# Altium PCB USB_Switcher_v0.0.PcbDoc
Units mil, origin at the board's own origin, x right, y up, seen from the top; angles counter-clockwise.
Board outline 1546.42 x 1811.68 mil, 2 copper layers (Top Layer, Bottom Layer); 11 components, 11 nets, 44 pads, 7 vias.
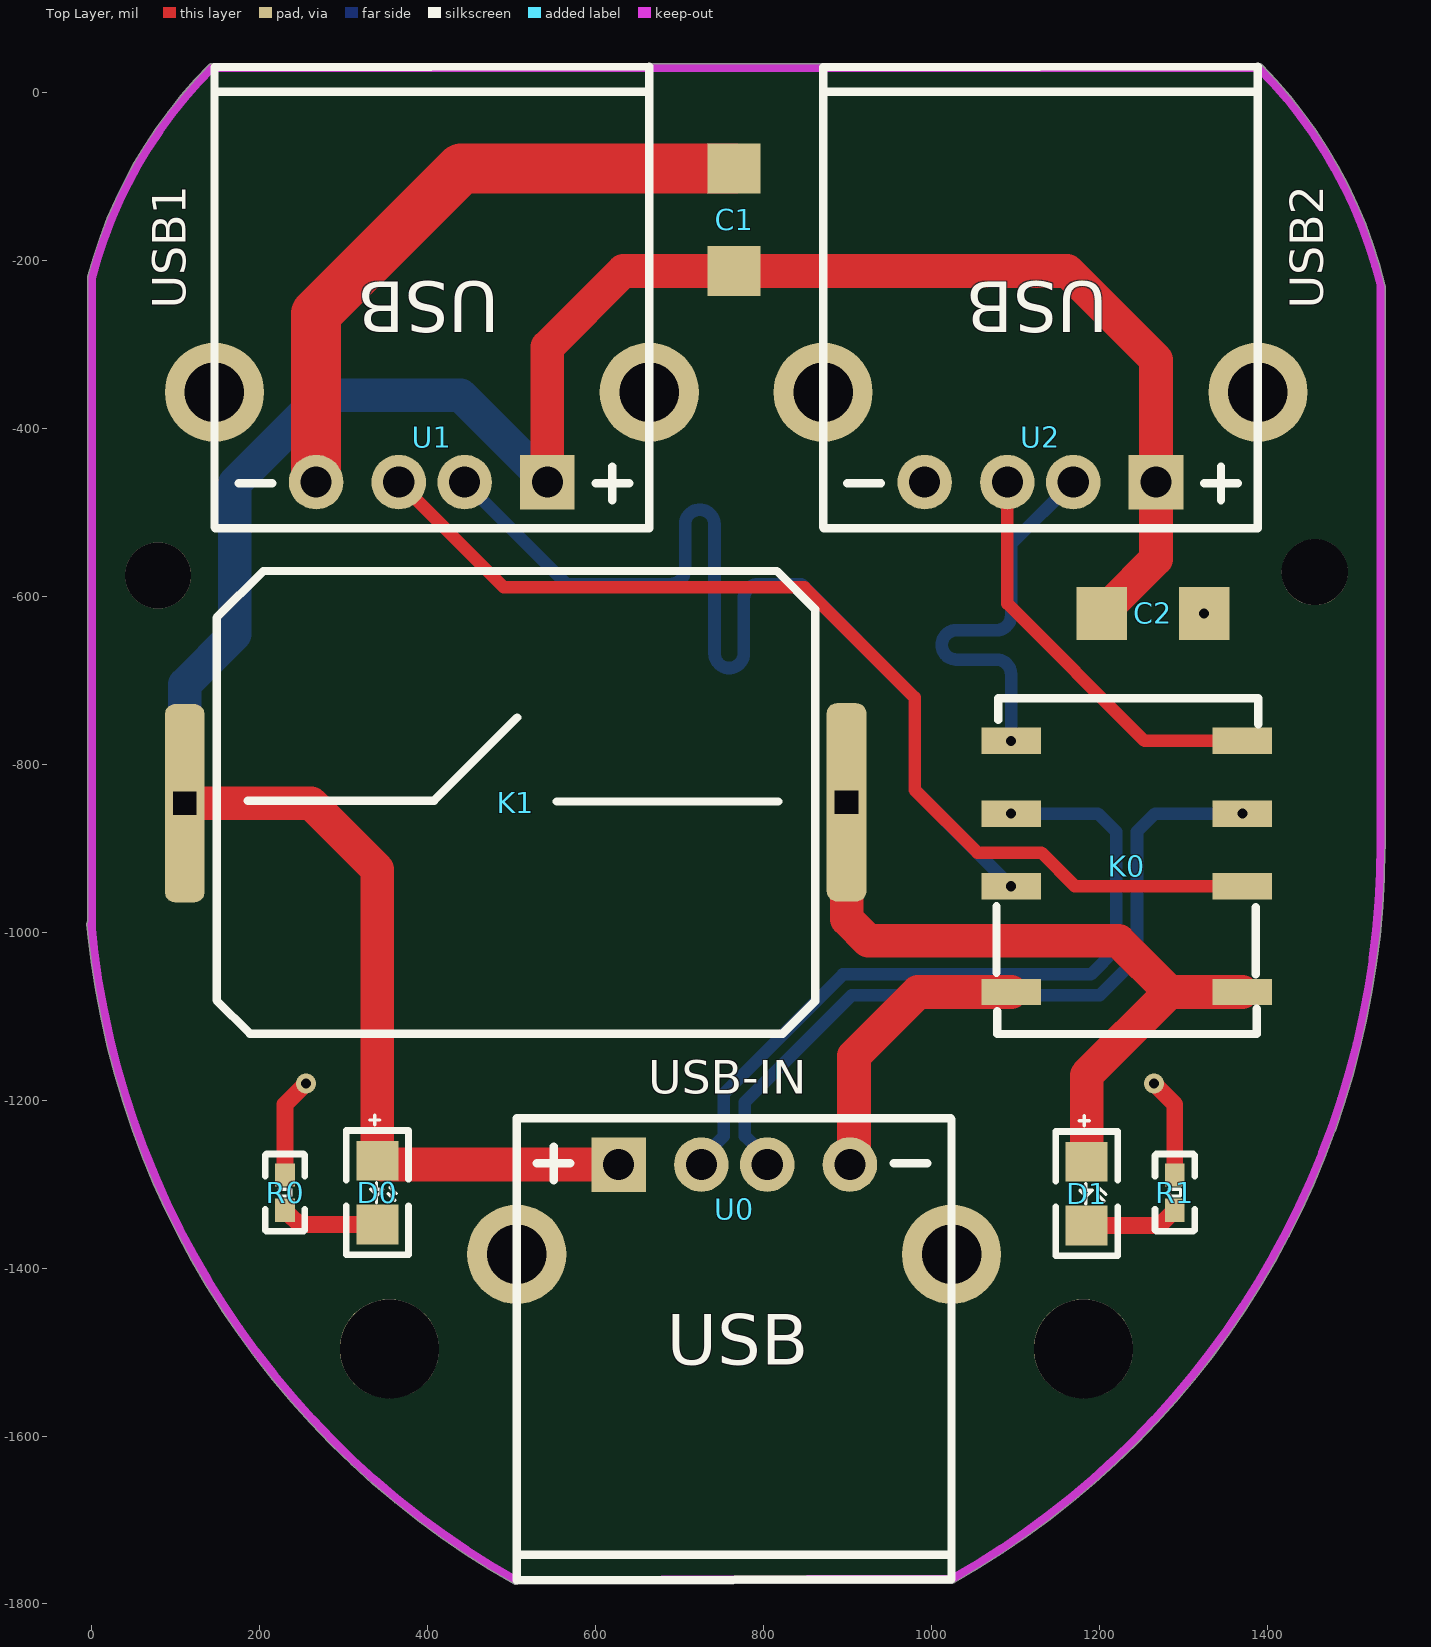
[diagram p0: Top Layer view]
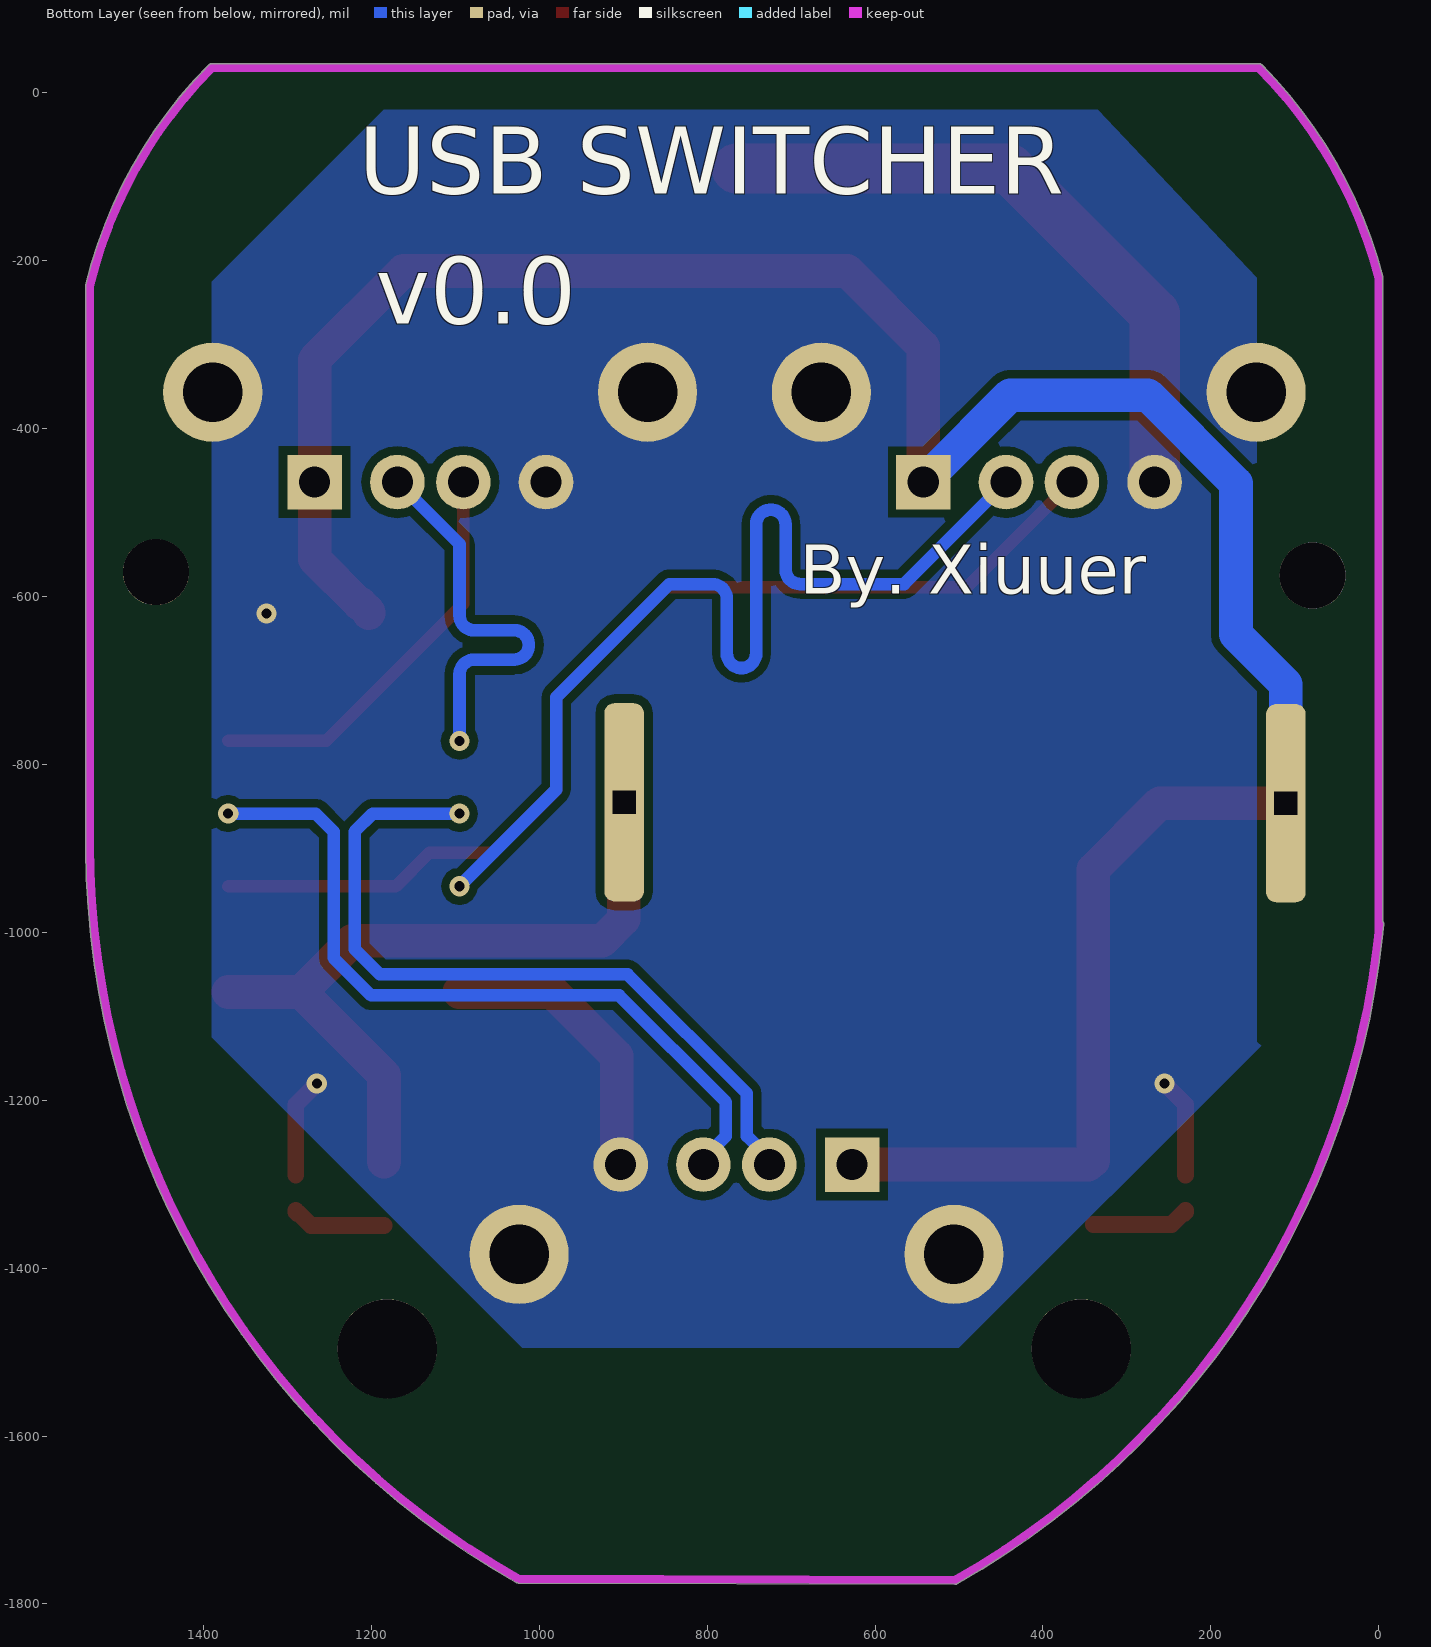
[diagram p1: Bottom Layer view, seen from below]
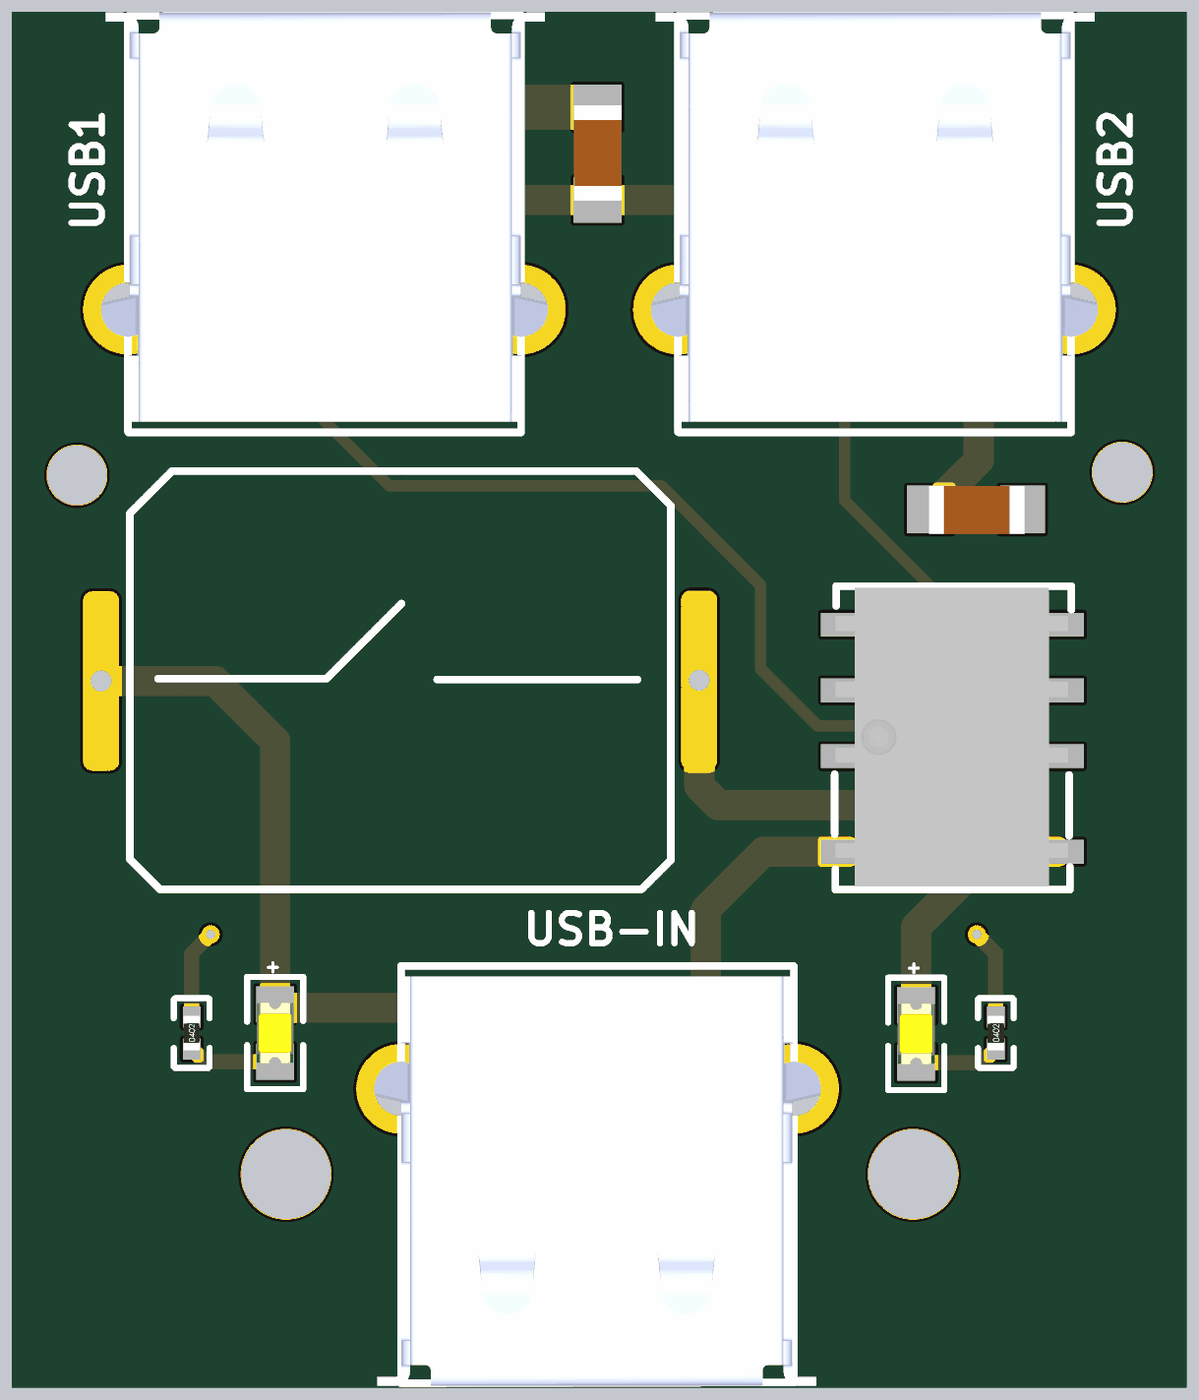
[diagram p2: 3D render of the assembled board from above, using the file's embedded part models]

## Layer stack, top to bottom
Top Solder: solder mask 0.4, Solder Resist, Dk 3.5
Top Layer: signal copper 1.4
Dielectric 1: dielectric 12.6, FR-4, Dk 4.8
Bottom Layer: signal copper 1.4
Bottom Solder: solder mask 0.4, Solder Resist, Dk 3.5

## Board outline
-5.01,-1000.13 cw(c1000,-896.65) -5.95,-990.56 cw(c-0.96,-990.09) -5.02,-987.14 -5.02,-220 -5.01,-220 cw(c0,-220) -4.85,-218.73 cw(c535,-360) 139.37,33.54 cw(c142.92,30) 142.95,35.01 1389.96,35.01 cw(c1390,30) 1393.56,33.54 cw(c997.92,-360) 1540.19,-228.32 cw(c1535.43,-229.9) 1540.45,-229.9 1540.45,-900 cw(c1535.43,-900) 1540.31,-901.18 cw(c530,-895) 1027.47,-1774.36 cw(c1025,-1770) 1025.02,-1775.01 505.02,-1776.67 cw(c505,-1771.65) 502.53,-1776.02 cw(c1000,-896.65) -4.93,-1000.9 cw(c0,-1000)

## Design rules (kind name [scope] priority, off if disabled: settings)
Clearance [All] p1: gap=10 ignorepadtopadclearanceinfootprint=FALSE except(0: Arc-Hole Track-Hole SMDPad-Hole THPad-Hole Via-Hole Fill-Hole Poly-Hole Region-Hole Text-Hole)
DiffPairsRouting [All] p1: maxlimit=10 minlimit=10 mostfreqgap=10 toplayer_minwidth=15 toplayer_maxwidth=15 toplayer_prefwidth=15 bottomlayer_minwidth=15 bottomlayer_maxwidth=15 bottomlayer_prefwidth=15 maxuncoupledlength=500
PolygonConnect [All] p1: connectstyle=Direct reliefconductorwidth=10 reliefentries=4 polygonreliefangle="90 Angle" airgapwidth=10
RoutingVias [All] p1: holewidth=28 width=50 viastyle="Through Hole" minholewidth=28 minwidth=50 maxholewidth=28 maxwidth=50
SolderMaskExpansion [All] p1: expansion=4 istentingtop=FALSE
Width [All] p1: maxlimit=100 minlimit=10 preferedwidth=20
29 further rules are at their usual default settings.

## Classes and differential pairs
net class dp: D0_N D0_P D1_N D1_P D2_N D2_P
differential pair D2: +D2_P -D2_N
differential pair D1: +D1_P -D1_N
differential pair D0: +D0_P -D0_N

## Components (designator, comment, footprint, x,y, rotation, side; value= is the part's Value field where it differs from the comment)
C1 "10uF" 1206-C 765,-150 r270 top
C2 "10uF" 1206-C 1265,-620 r180 top
D0 "LED_Y" LED-0805-YEL 340,-1310 r270 top
D1 "LED_Y" LED-0805-YEL 1185,-1311.09 r270 top
K0 "G6K-2F-Y" G6K-2F-Y 1370.59,-1070.98 r180 top locked
K1 "按键开关-2" KAN9A_2P_ON-OFF 111.57,-845 r0 top locked
R0 "1K" 0402-R 230,-1310 r90 top
R1 "1K" 0402-R 1290,-1310 r90 top
U0 "USB" USB-A 765,-1330 r0 top locked
U1 "USB" USB-A 405,-410 r180 top locked
U2 "USB" USB-A 1130,-410 r180 top locked

## Footprints (in the part's own frame and the unit in brackets; to place one, negate y for a bottom-side part, rotate by r counter-clockwise, add the part's x,y. Pads: shape width x height; smd on the part's side, far side on the other; paste and mask are expansions set on the pad)
0402-R [mm]
  rect 0.7x0.6 smd: 1(-0.533,0) 2(0.533,0)
  silkscreen extent -1.17,-0.6 1.17,0.6, body extent -0.57,-0.27 0.58,0.28, height 0.41
1206-C [mm]
  rect 1.52x1.6 smd: 1(-1.524,0) 2(1.576,0)
  body extent -1.6,-0.79 1.6,0.81, height 0.6
G6K-2F-Y [mm]
  rect 1.8x0.8 smd: 1(0,0) 2(0,-3.2) 3(0,-5.4) 4(0,-7.6) 5(7,-7.6) 6(7,-5.4) 7(7,-3.2) 8(7,0)
  silkscreen extent -0.48,-8.89 7.44,1.27, body extent -0.38,-8.84 7.42,1.16, height 5.2
KAN9A_2P_ON-OFF [mm]
  rrect50% 1.2x6 hole 0.7 square: 1(-0.025,-0.025) 2(20,0)
  silkscreen extent 0.94,-7 19.05,7
LED-0805-YEL [mil] "黄色贴片LED-0805"
  rect 47.24x50 smd: 1(-38,0) 2(38,0)
  silkscreen extent -93,-37 74,37, body extent -40,-25 40,25, height 43
USB-A [mil] "A型USB接口"
  rect 65x65 hole 37: 1(-137.6,53.5)
  round 65 hole 37: 2(-39,53.5) 3(39.5,53.5) 4(138,53.5)
  round 118.11 hole 70.87: 5(259,-53.5) 6(-259,-53.5)
  silkscreen extent -259,-442 259,108, body extent -312,-445 310,94, height 281

## Part data
C1 C2: library part CAP-无极性, "电容类"
D0 D1: library part LED, "LED"
K0: library part G6K, "双刀信号继电器"
R0 R1: library part RES, "电阻类"
U0 U1 U2: library part USB-2.0, "USB-2.0"

## Free pads (board coordinates)
  round 78.74 hole 78.74: 0(78.74,-574.8) 0(1456.69,-570.87)
  round 118.11 hole 118.11: 0(354.33,-1496.06) 0(1181.1,-1496.06)

## Via types
v1: diameter 24, hole 12, Top Layer to Bottom Layer, 7 vias

## Nets (pads, with @x,y where several pads share a name; then routed paths per layer and width w, separated by ;. In a path a pad name is that pad's centre, name@x,y a point inside that pad or via, vN(x,y) a via of type N, cw(c..) or ccw(c..) an arc to the next point about the centre after c; other vN are vias at no path point)
5V: C1.2 C2.2 D0.1 K1.1 U0.1 U1.1 U2.1 | length 3060.3
  Top Layer w40: K1.1 261,-846 340,-925 D0.1 341.38,-1272 345.88,-1276.5 U0.1 ; U1.1 542.6,-302.4 632.95,-212.05 C1.2 1162.05,-212.05 1267.6,-317.6 U2.1 1267.6,-555.35 1214.45,-608.5 1212.87,-608.5 1202.95,-618.43 C2.2
  Bottom Layer w40: K1.1 110.57,-704.43 170,-645 170,-465 275,-360 439.1,-360 530.1,-451 U1.1
D0_N: K0.6 U0.2 | length 908.1
  Bottom Layer w15: U0.2 726,-1269.46 752.75,-1242.71 752.75,-1191.89 894.64,-1050 1190,-1050 1220,-1020 1220,-880 1198.39,-858.39 v1(1095,-858.39)
D0_P: K0.3 U0.3 | length 908.7
  Bottom Layer w15: U0.3 804.5,-1269.46 777.75,-1242.71 777.75,-1202.25 905,-1075 1200.36,-1075 1245,-1030.36 1245,-880 1266.61,-858.39 v1(1370.59,-858.39)
D1_N: K0.7 U1.2 | length 1246.9
  Bottom Layer w15: U1.2 565.5,-585 681.6,-585 689.1,-585 ccw(c689.1,-567.5) 706.6,-567.5 706.6,-513.94 cw(c724.1,-513.94) 741.6,-513.94 741.6,-667.5 ccw(c759.1,-667.5) 776.6,-667.5 776.6,-602.5 cw(c794.1,-602.5) 794.1,-585 825,-585 845,-585 980,-720 980,-830 v1(1095,-945)
D1_P: K0.2 U1.3 | length 1269
  Top Layer w15: U1.3 490.83,-588.83 848.83,-588.83 980,-720 980,-830 1055,-905 1130.93,-905 1170.93,-945 K0.2
D2_N: K0.5 U2.2 | length 474.1
  Bottom Layer w15: v1(1095,-771.77) 1095,-700 1095,-692.5 ccw(c1077.5,-692.5) 1077.5,-675 1029.9,-675 cw(c1029.9,-657.5) 1029.9,-640 1077.5,-640 ccw(c1077.5,-622.5) 1095,-622.5 1095,-585 1095,-537.5 U2.2
D2_P: K0.4 U2.3 | length 492.5
  Top Layer w15: U2.3 1090.5,-608.19 1254.08,-771.77 K0.4
GND: C1.1 C2.1 K0.8 R0.2 R1.2 U0.4 U0.5 U0.6 U1.4 U1.5 U1.6 U2.4 U2.5 U2.6 | length 1358.9
  Top Layer w20: R0.2 230,-1205 v1(255,-1180) ; v1(1265,-1180) 1290,-1205 R1.2
  Top Layer w40: U0.4 907.78,-1271.72 907.78,-1147.22 984.02,-1070.98 K0.8
  Top Layer w60: U1.4 267,-263 440,-90 C1.1
  other v1: 1325,-620
NetD0_2: D0.2 R0.1 | length 118.2
  Top Layer w20: R0.1 230,-1332.97 231.81,-1334.78 233.78,-1334.78 247,-1348 D0.2
NetD1_1: D1.1 K0.1 K1.2 | length 889.8
  Top Layer w40: K1.2 899.32,-845.35 899.32,-984.32 925,-1010 1223.03,-1010 1284.02,-1070.98 ; D1.1 1185,-1170 1284.02,-1070.98 ; K0.1 1284.02,-1070.98
NetD1_2: D1.2 R1.1 | length 113.6
  Top Layer w20: D1.2 1271.91,-1349.09 1286.22,-1334.78 1288.19,-1334.78 1290,-1332.97 R1.1

## Polygon pours and split planes (outlines as drawn)
GND on Bottom Layer "Top Layer-No Net" (solid, pour order 0): 335,-20 1185,-20 1390,-225 1390,-1125 1020,-1495 500,-1495 140,-1135 145,-1130 145,-220

## Keep-outs
Keep-Out Layer:
  lines w10: -0.96,-990.09 ccw(c1000,-896.65) 505,-1771.65 1025,-1770 ccw(c530,-895) 1535.31,-895 ; 0,-1000 0,-220 cw(c535,-360) 142.92,30 1390,30 cw(c997.92,-360) 1535.42,-229.9 ; 1535.43,-900 1535.43,-229.9

## Silkscreen, mask and mechanical layers (free items; w line width, h text height)
Top Overlay:
  text "USB1" at 112,-257 h40 r90
  text "USB2" at 1467,-257 h40 r90
  text "USB-IN" at 663,-1192 h40
Bottom Overlay:
  text "USB SWITCHER" at 1215,-120 h80
  text "v0.0" at 1195,-275 h80
  text "By. Xiuuer" at 690,-615.55 h100